# EAGLE board Traffic Light Simulator (EAGLE 7.6.0)

Size 73.58 x 63.39 mm. Coordinates in mm from the lower left corner, seen from the top.
Outline: 0,0 56.82,0 56.82,53.33 0,53.33 0,0
Copper layers (1*16): Top 0.035mm / dielectric 1.5mm / Bottom 0.035mm
Design rules "default": minimum track width 10mil, minimum drill 24mil, track to track 8mil, track to pad 8mil, pad to pad 8mil, via to via 8mil, smd to smd 8mil, copper to edge 40mil, drill to drill 8mil, minimum pad ring 10mil, minimum via ring 8mil, stop-mask expansion 4mil, vias tented up to drill 0mil, thermal gap 10mil

## Footprints (pad centres in the part's own frame; a part is rotated, then mirrored left to right if it is on the bottom)
LED5MM = drill 0.813 octagon: A -1.27,0; K 1.27,0
0207/10 = drill 0.813 octagon: 1 -5.08,0; 2 5.08,0
ARDUINO_UNO = drill 1.016 pad 1.88: 0 63.5,50.8; 1 60.96,50.8; 2 58.42,50.8; 3 55.88,50.8; 3.3V 35.56,2.54; 4 53.34,50.8; 5 50.8,50.8; 5V 38.1,2.54; 6 48.26,50.8; 7 45.72,50.8; 8 41.656,50.8; 9 39.116,50.8; 10 36.576,50.8; 11 34.036,50.8; 12 31.496,50.8; 13 28.956,50.8; A0 50.8,2.54; A1 53.34,2.54; A2 55.88,2.54; A3 58.42,2.54; A4 60.96,2.54; A5 63.5,2.54; AREF 23.876,50.8; GND 26.416,50.8; GND. 43.18,2.54; GND.. 40.64,2.54; I/OREF 30.48,2.54; N/C 27.94,2.54; RESET 33.02,2.54; SCL 18.796,50.8; SDA 21.336,50.8; VIN 45.72,2.54 | hole 3.2: 66.04,7.62; 66.04,35.56; 15.24,50.8; 13.97,2.54

## Placement (x,y rotation side)
D1  [LED5MM]  5,60.88 0 top
D2  [LED5MM]  5,73.58 0 top  (outside the outline)
D3  [LED5MM]  5,22.78 0 top
D4  [LED5MM]  5,35.48 0 top
D7  [LED5MM]  5,98.98 0 top  (outside the outline)
D8  [LED5MM]  5,111.68 0 top  (outside the outline)
D10  [LED5MM]  5,314.88 0 top  (outside the outline)
D11  [LED5MM]  5,137.08 0 top  (outside the outline)
D17  [LED5MM]  5,429.18 0 top  (outside the outline)
D18  [LED5MM]  5,441.88 0 top  (outside the outline)
D19  [LED5MM]  5,454.58 0 top  (outside the outline)
D20  [LED5MM]  5,467.28 0 top  (outside the outline)
DA  [LED5MM]  5,48.18 0 top
DB  [LED5MM]  5,365.68 0 top  (outside the outline)
DC  [LED5MM]  5,149.78 0 top  (outside the outline)
DD  [LED5MM]  5,327.58 0 top  (outside the outline)
DE  [LED5MM]  5,124.38 0 top  (outside the outline)
DF  [LED5MM]  5,340.28 0 top  (outside the outline)
DG  [LED5MM]  5,86.28 0 top  (outside the outline)
DH  [LED5MM]  5,352.98 0 top  (outside the outline)
R1  1k‎Ω  [0207/10]  5,162.48 0 top  (outside the outline)
R2  1k‎Ω  [0207/10]  5,175.18 0 top  (outside the outline)
R3  1k‎Ω  [0207/10]  5,187.88 0 top  (outside the outline)
R4  1k‎Ω  [0207/10]  5,378.38 0 top  (outside the outline)
R5  1k‎Ω  [0207/10]  5,391.08 0 top  (outside the outline)
R6  1k‎Ω  [0207/10]  5,403.78 0 top  (outside the outline)
R7  1k‎Ω  [0207/10]  5,200.58 0 top  (outside the outline)
R8  1k‎Ω  [0207/10]  5,213.28 0 top  (outside the outline)
R9  1k‎Ω  [0207/10]  5,225.98 0 top  (outside the outline)
R10  1k‎Ω  [0207/10]  5,416.48 0 top  (outside the outline)
R11  1k‎Ω  [0207/10]  5,238.68 0 top  (outside the outline)
R12  1k‎Ω  [0207/10]  5,251.38 0 top  (outside the outline)
R13  1k‎Ω  [0207/10]  5,264.08 0 top  (outside the outline)
R14  1k‎Ω  [0207/10]  5,276.78 0 top  (outside the outline)
R15  1k‎Ω  [0207/10]  5,289.48 0 top  (outside the outline)
R16  1k‎Ω  [0207/10]  5,302.18 0 top  (outside the outline)
R17  1k‎Ω  [0207/10]  5,479.98 0 top  (outside the outline)
R18  1k‎Ω  [0207/10]  5,492.68 0 top  (outside the outline)
R19  1k‎Ω  [0207/10]  5,505.38 0 top  (outside the outline)
R20  1k‎Ω  [0207/10]  5,518.08 0 top  (outside the outline)
U1  [ARDUINO_UNO]  5,10.08 0 top

## Library data of the parts
D1-D4 D7 D8 D10 D11 D17-D20 DA DB DC DD DE DF DG DH R1-R20 U1 = AUTODESK_CIRCUITS_BREADBOARD

## Nets
N$1: D1.A R1.1 R1.2 U1.10
N$2: D2.A R2.1 R2.2 U1.9
N$3: DG.A R3.1 R3.2 U1.8
N$4: D4.A R14.1 R14.2 U1.7
N$5: D3.A R15.1 R15.2 U1.6
N$6: DA.A R16.1 R16.2 U1.5
N$7: D10.A R7.1 R7.2 U1.2
N$8: D11.A R8.1 R8.2 U1.3
N$9: DC.A R9.1 R9.2 U1.4
N$10: D7.A R11.1 R11.2 U1.13
N$11: D8.A R12.1 R12.2 U1.12
N$12: DE.A R13.1 R13.2 U1.11
N$13: DD.A R6.1 R6.2 U1.1
N$14: D1.K D2.K D3.K D4.K D7.K D8.K D10.K D11.K D17.K D18.K D19.K D20.K DA.K DB.K DC.K DD.K DE.K DF.K DG.K DH.K U1.GND
N$15: DB.A R10.1 R10.2 U1.A4
N$16: D17.A R18.1 R18.2 U1.A0
N$17: D19.A R20.1 R20.2 U1.A3
N$18: D20.A R19.1 R19.2 U1.A1
N$19: D18.A R17.1 R17.2 U1.A2
N$20: DF.A R4.1 R4.2 U1.0
N$21: DH.A R5.1 R5.2 U1.A5

## Tracks (layer width: path | path; a pad name or v marks a point on that pad's centre or on a via)
N$1  (3 unrouted)
N$2  (3 unrouted)
N$3  (3 unrouted)
N$4  (3 unrouted)
N$5  (3 unrouted)
N$6  (3 unrouted)
N$7  (3 unrouted)
N$8  (3 unrouted)
N$9  (3 unrouted)
N$10  (3 unrouted)
N$11  (3 unrouted)
N$12  (3 unrouted)
N$13  (3 unrouted)
N$14  (20 unrouted)
N$15  (3 unrouted)
N$16  (3 unrouted)
N$17  (3 unrouted)
N$18  (3 unrouted)
N$19  (3 unrouted)
N$20  (3 unrouted)
N$21  (3 unrouted)